# Altium PCB PCB_Placa-control-con-pi_2026-08-25.pcbdoc
Units mil, origin at the board's own origin, x right, y up, seen from the top; angles counter-clockwise.
Board outline 18712.17 x 9712.58 mil, 2 copper layers (Top Layer, Bottom Layer); 54 components, 56 nets, 179 pads, 7 vias.
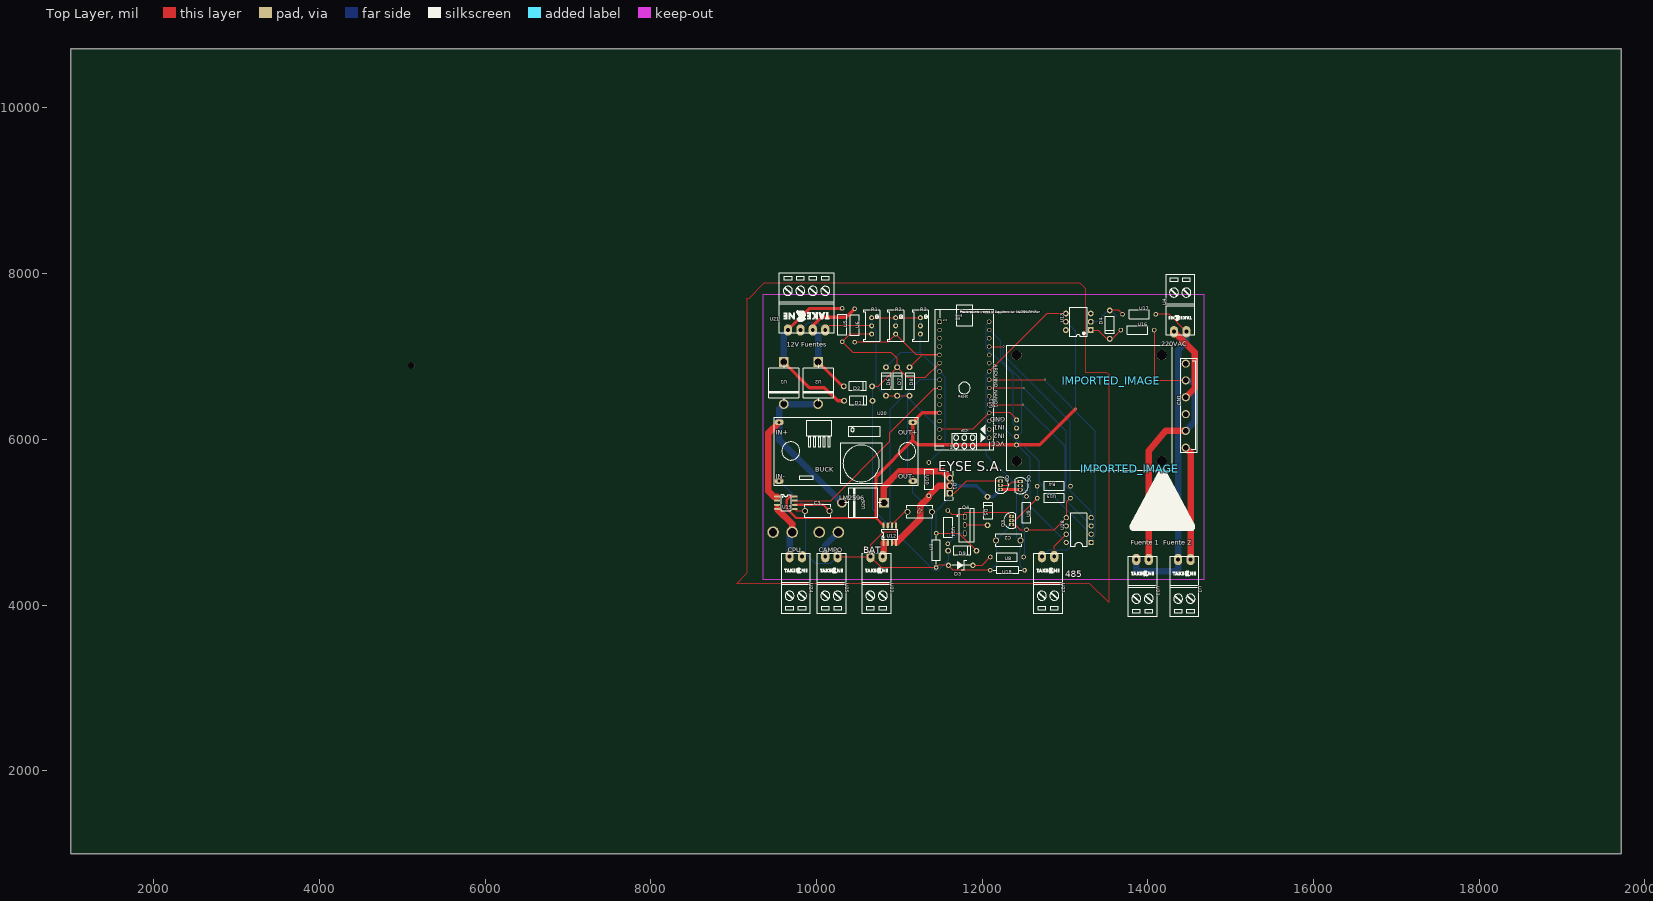
[diagram p0: Top Layer view]
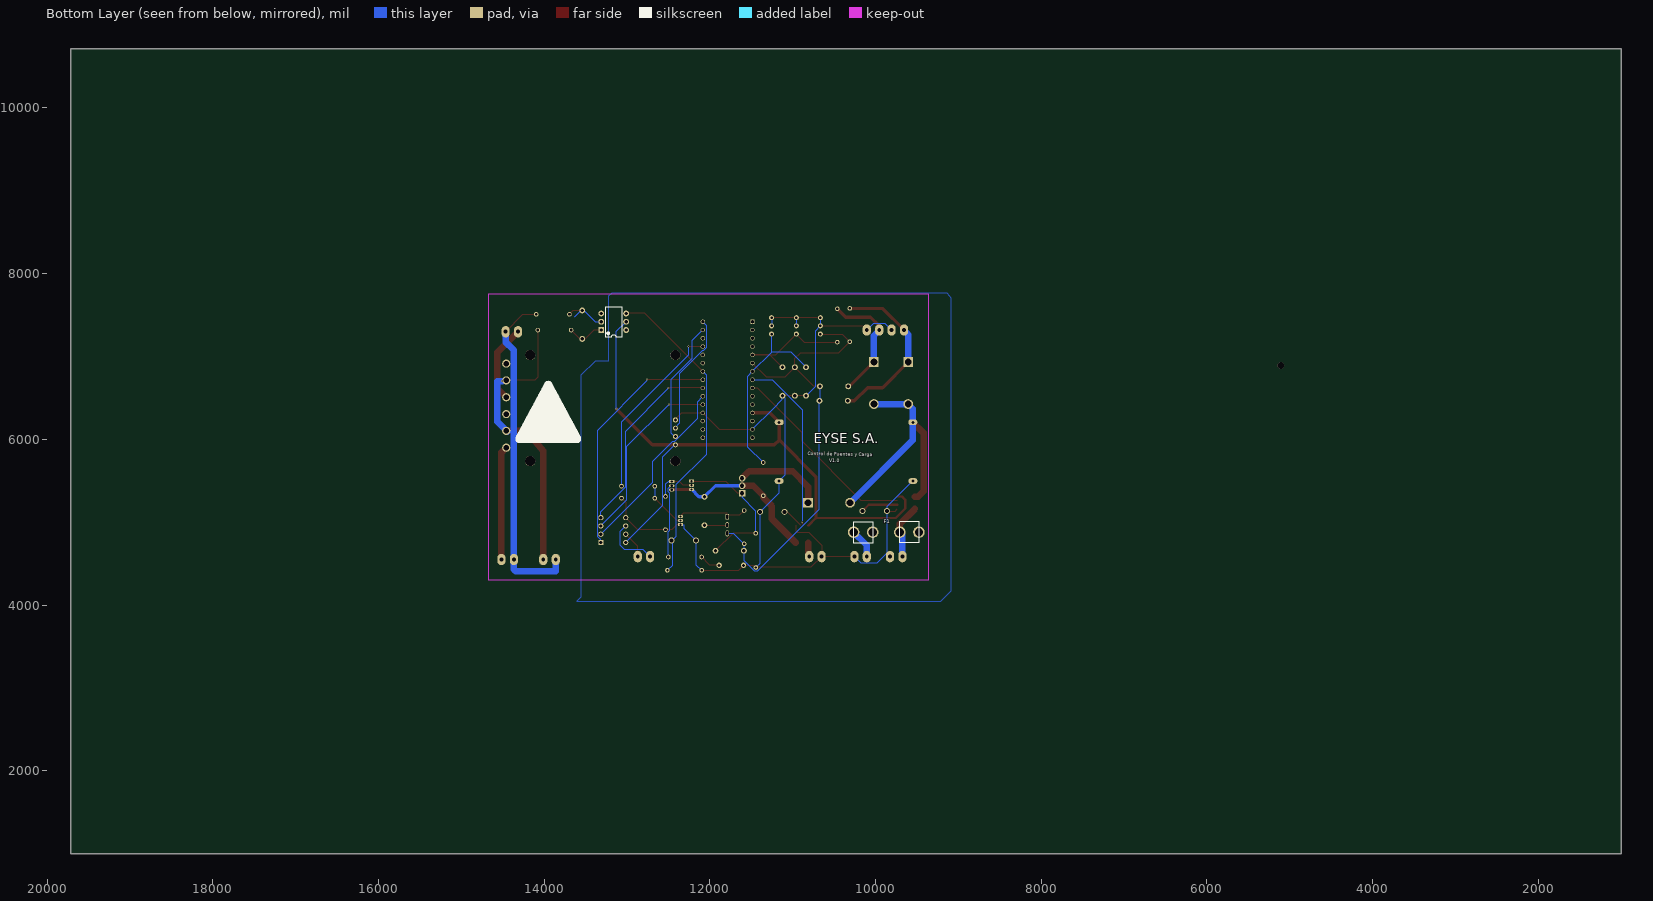
[diagram p1: Bottom Layer view, seen from below]

## Layer stack, top to bottom
Top Layer: signal copper (thickness not stored)
Dielectric: dielectric 12.6, FR-4, Dk 4.8
Bottom Layer: signal copper (thickness not stored)

## Board outline
19712.17,1000 1000,1000 1000,10712.58 19712.17,10712.58

## Components (designator, comment, footprint, x,y, rotation, side; value= is the part's Value field where it differs from the comment)
ARDUINO_NANO1 "ARDUINONANOV30_ARDUINO_NANO" ARDUINONANOV30_ARDUINO_NANO 11785.1,6619.56 r270 top
C1 "1nF" CAP-TH_L8.0-W4.0-P7.50-D1.2 11245.1,5124.56 r180 top
C2 "22nF" CAP-TH_L8.0-W4.0-P7.50-D1.2 12315.1,4779.56 r0 top
C3 "1nF" CAP-TH_L8.0-W4.0-P7.50-D1.2 10010.1,5134.56 r0 top
CN1 "Conn Reles" CONN66 14475.11,6198.95 r90 top
D1 "1N4007" DO-41_BD2.4-L4.7-P8.70-D0.9-RD 10505.1,6464.56 r180 top
D2 "1N4007" DO-41_BD2.4-L4.7-P8.70-D0.9-RD 10500.1,6639.56 r180 top
D3 "ZENNER-10 V" "ZENNER 7.5MM" 11750.1,4479.56 r0 top
D4 "1N4007" DO-41_BD2.4-L4.7-P8.70-D0.9-RD 13540.11,7383.95 r90 top
D5 "1N4007" DO-41_BD2.4-L4.7-P8.70-D0.9-RD 12065.1,5134.56 r270 top
D6 "1N4733A" DO-41_BD2.4-L4.7-P8.70-D0.9-RD 10838.49,6697.95 r270 top
D7 "1N4733A" DO-41_BD2.4-L4.7-P8.70-D0.9-RD 10973.49,6697.95 r270 top
D8 "1N4733A" DO-41_BD2.4-L4.7-P8.70-D0.9-RD 11123.49,6697.95 r270 top
D9 "1N4007" DO-41_BD2.4-L4.7-P8.70-D0.9-RD 11760.1,4654.56 r180 top
F1 "FUSEX20MM" FUSE_5MM 9870.1,4879.56 r90 bottom
IMPORTED_IMAGE "IMPORTED_IMAGE" IMPORTED_IMAGE 13556.43,6704.24 r0 top
IMPORTED_IMAGE "IMPORTED_IMAGE" IMPORTED_IMAGE 13781.37,5642.96 r0 top
Q1 "AP40P03GJ" TO-251_L6.6-W2.4-P2.30-L 11610.1,5439.56 r90 top
Q3 "2N3904" ? 12355.1,5019.56 r90 top
Q4 "IRF9530PBF" TO-220-3_L10.2-W4.5-P2.54-L 11790.1,4964.56 r270 top
Q5 "BC558B" TO-92-3_L4.9-W3.7-P1.27-L 12220.1,5444.56 r270 top
Q6 "BC558B" TO-92-3_L4.9-W3.7-P1.27-L 12460.1,5439.56 r270 top
R1 "Rvar- 50kΩ" RES-ADJ-TH_3P-L10.0-W10.0-P2.50-BL-BS 10665.1,7369.56 r0 top
R2 "Rvar- 50kΩ" RES-ADJ-TH_3P-L10.0-W10.0-P2.50-BL-BS 10955.1,7369.56 r0 top
R3 "Rvar- 50kΩ" RES-ADJ-TH_3P-L10.0-W10.0-P2.50-BL-BS 11255.1,7369.56 r0 top
R4 "3.3kΩ" RES-TH_BD2.7-L6.2-P10.20-D0.4 12865.1,5434.56 r180 top
U1 "20A10" R-6_BD8.9-L8.9-P12.90-D1.3-FD 9605.1,6679.56 r270 top
U2 "20A10" R-6_BD8.9-L8.9-P12.90-D1.3-FD 10020.1,6679.56 r270 top
U3 "18kΩ" RES-TH_BD2.3-L6.5-P10.50-D0.5 11445.1,4659.56 r90 top
U4 "Alim F1" "DETACHABLE SCREW TERMINAL 2 PIN 3.81 PITCH" 14390.11,7298.95 r90 top
U5 "150kΩ" RES-TH_BD2.7-L6.2-P10.20-D0.4 10310.1,7379.56 r90 top
U6 "150kΩ" RES-TH_BD2.7-L6.2-P10.20-D0.4 10460.1,7374.56 r90 top
U7 "Alim F2" "DETACHABLE SCREW TERMINAL 2 PIN 3.81 PITCH" 14440.11,4548.95 r270 top
U8 "56kΩ" RES-TH_BD2.7-L6.2-P10.20-D0.4 12300.1,4579.56 r0 top
U9 "18kΩ" RES-TH_BD2.7-L6.2-P10.20-D0.4 12535.1,5109.56 r90 top
U10 "150kΩ" RES-TH_BD2.7-L6.2-P10.20-D0.4 11355.1,5519.56 r270 top
U11 "Rele 2-modul" "RELE 2-X MODULE" 12315.11,5633.95 r90 top
U12 "ACS712ELCTR-05B-T-JSM" SOP-8_L4.9-W3.9-P1.27-LS6.0-BL 10885.1,4854.56 r0 top
U13 "4N35" 4N35 13160.11,7418.95 r90 top
U14 "10kΩ" RES-TH_BD2.7-L6.2-P10.20-D0.4 11585.1,4939.56 r270 top
U15 "10kΩ" RES-TH_BD2.7-L6.2-P10.20-D0.4 12865.1,5289.56 r180 top
U16 "56kΩ" RES-TH_BD2.7-L6.2-P10.20-D0.4 13875.11,7318.95 r0 top
U17 "56kΩ" RES-TH_BD2.7-L6.2-P10.20-D0.4 13895.11,7508.95 r0 top
U18 "18kΩ" RES-TH_BD2.3-L6.5-P10.50-D0.5 12305.1,4419.56 r0 top
U19 "ACS712ELCTR-05B-T-JSM" SOP-8_L4.9-W3.9-P1.27-LS6.0-BL 9630.1,5234.56 r270 top
U20 "LM2596 Fuente 5v" LM2596-BUCK-MODULE 9490.1,6264.56 r0 top
U21 "Entrada de Fuentes" "DETACHABLE SCREW TERMINAL 4 PIN 3.81 PITCH" 9880.1,7319.56 r90 top
U22 "Entrada Bateria" "DETACHABLE SCREW TERMINAL 2 PIN 3.81 PITCH" 10725.1,4584.56 r270 top
U23 "Entrada 220V" "DETACHABLE SCREW TERMINAL 2 PIN 3.81 PITCH" 13935.11,4548.95 r270 top
U24 "Alim Logotron" "DETACHABLE SCREW TERMINAL 2 PIN 3.81 PITCH" 9750.1,4584.56 r270 top
U25 "Alim Campo" "DETACHABLE SCREW TERMINAL 2 PIN 3.81 PITCH" 10180.1,4584.56 r270 top
U26 "20A10" R-6_BD8.9-L8.9-P12.90-D1.3-FD 10560.1,5234.56 r180 top
U27 "COM 485" "DETACHABLE SCREW TERMINAL 2 PIN 3.81 PITCH" 12795.1,4584.56 r270 top
U28 "MAX485EN" DIP-8_L10.0-W6.5-P2.54-LS7.6-BL 13165.1,4904.56 r90 top

## Footprints (in the part's own frame and the unit in brackets; to place one, negate y for a bottom-side part, rotate by r counter-clockwise, add the part's x,y. Pads: shape width x height; smd on the part's side, far side on the other; paste and mask are expansions set on the pad)
4N35 [mm]
  rect 1.8x1.8 hole 1 paste+0 mask+0.102: 1(-2.54,-3.81)
  round 1.8 hole 1 paste+0 mask+0.102: 2(0,-3.81) 3(2.54,-3.81) 4(2.54,3.81) 5(0,3.81) 6(-2.54,3.81)
  silkscreen extent -4.57,-2.65 4.45,2.65
ARDUINONANOV30_ARDUINO_NANO [mil]
  rect 51.5x51.5 hole 31.5 slot 31.7 at 0 deg paste+0 mask+2: 1(-800,-300)
  round 51.5 hole 31.5 slot 31.7 at 0 deg paste+0 mask+2: 2(-700,-300) 3(-600,-300) 4(-500,-300) 5(-400,-300) 6(-300,-300) 7(-200,-300) 8(-100,-300) 9(0,-300) 10(100,-300) 11(200,-300) 12(300,-300) 13(400,-300) 14(500,-300) 15(600,-300) 16(600,300) 17(500,300) 18(400,300) 19(300,300) 20(200,300) 21(100,300) 22(0,300) 23(-100,300) 24(-200,300) 25(-300,300) 26(-400,300) 27(-500,300) 28(-600,300) 29(-700,300) 30(-800,300)
  silkscreen extent -1000,-350 750,350
CAP-TH_L8.0-W4.0-P7.50-D1.2 [mm]
  round 1.8 hole 1.2 paste+0 mask+0.051: 1(-3.75,0) 2(3.75,0)
  silkscreen extent -4,-2 4,2
CONN66 [mm]
  round 2.5 hole 1.7 paste+0 mask+0.051: 1(18.161,0.445) 2(13.005,0.445) 3(7.849,0.445) 4(2.692,0.445) 5(-2.464,0.445) 6(-7.62,0.445)
  silkscreen extent -9.14,-2.92 19.81,2.03
"DETACHABLE SCREW TERMINAL 2 PIN 3.81 PITCH" [mm]
  oval 3.5x2.5 hole 1.2 paste+0 mask+0.051: 1(0,1.905) 2(0,-1.905)
  silkscreen extent -1.02,-4.32 17.6,4.32
"DETACHABLE SCREW TERMINAL 4 PIN 3.81 PITCH" [mm]
  oval 3.5x2.5 hole 1.2 paste+0 mask+0.051: 1(0,5.715) 2(0,1.905) 3(0,-1.905) 4(0,-5.715)
  silkscreen extent -1,-8.35 17.6,8.3
DIP-8_L10.0-W6.5-P2.54-LS7.6-BL [mil]
  rect 63x63 hole 39.37 paste+0 mask+2: 1(-150,-150)
  round 63 hole 39.37 paste+0 mask+2: 2(-50,-150) 3(50,-150) 4(150,-150) 5(150,150) 6(50,150) 7(-50,150) 8(-150,150)
  silkscreen extent -200,-100 200,100
DO-41_BD2.4-L4.7-P8.70-D0.9-RD [mm]
  round 1.8 hole 1 paste+0 mask+0.051: 1(-4.35,0) 2(4.35,0)
  silkscreen extent -2.6,-1.4 2.6,1.4
FUSE_5MM [mil]
  round 140 hole 100 paste+0 mask+2: 1(0,394) 2(0,164) 3(0,-164) 4(0,-394)
  silkscreen extent -127,-399 127,399
IMPORTED_IMAGE [mil]
LM2596-BUCK-MODULE [mm]
  oval 2.8x1.8 hole 0.9 paste+0 mask+0.102: 1(1.5,-1.5)
  oval 2.8x1.8 hole 0.914 paste+0 mask+0.102: 2(1.5,-19.5) 3(42.5,-1.5) 4(42.5,-19.5)
  silkscreen extent 0,-21 44,0
R-6_BD8.9-L8.9-P12.90-D1.3-FD [mm]
  rect 3x3 hole 2.1 paste+0 mask+0.051: 1(-6.45,0)
  round 3 hole 2.1 paste+0 mask+0.051: 2(6.45,0)
  silkscreen extent -5.6,-4.55 5.6,4.55
"RELE 2-X MODULE" [mm]
  round 1.524 hole 0.914 paste+0 mask+0.102: 1(15.24,-2.54) 2(12.7,-2.54) 3(10.16,-2.54) 4(7.62,-2.54)
  round 3.1 hole 3.1 unplated paste+0: ""(2.6,-2.54) ""(2.6,-47.04) ""(35.1,-47.04) ""(35.1,-2.54)
  silkscreen extent -0.4,-50.04 38.1,0.46
RES-ADJ-TH_3P-L10.0-W10.0-P2.50-BL-BS [mil]
  round 60 hole 30 paste+0 mask+2: 1(0,98.43) 2(0,0) 3(0,-98.43)
  silkscreen extent -98,-187 96,187
RES-TH_BD2.3-L6.5-P10.50-D0.5 [mm]
  round 1.4 hole 0.7 paste+0 mask+0.051: 1(-5.25,0) 2(5.25,0)
  silkscreen extent -4.32,-1.15 4.32,1.15
RES-TH_BD2.7-L6.2-P10.20-D0.4 [mm]
  round 1.4 hole 0.8 paste+0 mask+0.051: 1(-5.1,0) 2(5.1,0)
  silkscreen extent -3.1,-1.35 3.1,1.35
SOP-8_L4.9-W3.9-P1.27-LS6.0-BL [mm]
  oval 0.63x1.865 smd paste+0 mask+0.051: 1(-1.905,-2.682) 2(-0.635,-2.682) 3(0.635,-2.682) 4(1.905,-2.682) 5(1.905,2.682) 6(0.635,2.682) 7(-0.635,2.682) 8(-1.905,2.682)
  silkscreen extent -2.5,-1.5 2.5,1.48
TO-92-3_L4.9-W3.7-P1.27-L [mm]
  rect 0.9x1.6 hole 0.7 paste+0 mask+0.051: 1(-1.27,0)
  oval 0.9x1.6 hole 0.7 paste+0 mask+0.051: 2(0,0) 3(1.27,0)
  silkscreen extent -2.48,-1.5 2.48,2.48
TO-220-3_L10.2-W4.5-P2.54-L [mm]
  rect 1.8x1 hole 0.6 slot 1.2 at 0 deg paste+0 mask+0.051: 1(-2.54,0)
  oval 1.8x1 hole 0.6 slot 1.2 at 0 deg paste+0 mask+0.051: 2(0,0) 3(2.54,0)
  silkscreen extent -5.23,-2.42 5.23,2.8
TO-251_L6.6-W2.4-P2.30-L [mm]
  rect 2x2 hole 1.3 paste+0 mask+0.051: 1(-2.3,0)
  round 2 hole 1.3 paste+0 mask+0.051: 2(0,0) 3(2.3,0)
  silkscreen extent -4.44,-1.06 4.44,1.69
"ZENNER 7.5MM" [mm]
  round 1.642 hole 0.913 paste+0 mask+0.102: 1(-4,0) 2(3.5,0)
  silkscreen extent -2.93,-1.5 2.5,1.5
? [mm]
  rect 0.9x1.6 hole 0.7 paste+0 mask+0.051: 1(-1.27,0)
  oval 0.9x1.6 hole 0.7 paste+0 mask+0.051: 2(0,0) 3(1.27,0)
  silkscreen extent -2.41,-1.35 2.41,2.41

## Free pads (board coordinates)
  round 80 hole 80 unplated paste+0: ""(5105.93,6891.38)

## Via types
v1: diameter 24, hole 12, Top Layer to Bottom Layer, tented both sides, 6 vias
v2: diameter 24.41, hole 12.2, Top Layer to Bottom Layer, tented both sides, 1 vias

## Nets (pads, with @x,y where several pads share a name; then routed paths per layer and width w, separated by ;. In a path a pad name is that pad's centre, name@x,y a point inside that pad or via, vN(x,y) a via of type N, cw(c..) or ccw(c..) an arc to the next point about the centre after c; other vN are vias at no path point)
ARDUINO_NANO1_1: ARDUINO_NANO1.1
ARDUINO_NANO1_2: ARDUINO_NANO1.2
ARDUINO_NANO1_3: ARDUINO_NANO1.3
ARDUINO_NANO1_4: ARDUINO_NANO1.4
ARDUINO_NANO1_10: ARDUINO_NANO1.10
ARDUINO_NANO1_11: ARDUINO_NANO1.11
ARDUINO_NANO1_13: ARDUINO_NANO1.13
ARDUINO_NANO1_15: ARDUINO_NANO1.15
ARDUINO_NANO1_16: ARDUINO_NANO1.16
ARDUINO_NANO1_17: ARDUINO_NANO1.17
ARDUINO_NANO1_18: ARDUINO_NANO1.18
ARDUINO_NANO1_20: ARDUINO_NANO1.20 U28.3 | length 2214.2
  Top Layer w10: ARDUINO_NANO1.20 v1(12494.29,6419.56)
  Bottom Layer w10: v1(12494.29,6419.56) 12999.99,5913.86 12999.99,5269.67 U28.3
ARDUINO_NANO1_21: ARDUINO_NANO1.21 U28.2 | length 2187.5
  Bottom Layer w10: ARDUINO_NANO1.21 12148.29,6456.37 12148.29,6252.69 12423.59,5977.39 12445.89,5977.39 12686.89,5736.39 12686.89,5482.77 U28.2
ARDUINO_NANO1_22: ARDUINO_NANO1.22 U28.4 | length 2315.1
  Top Layer w10: ARDUINO_NANO1.22 v1(12495.85,6619.56)
  Bottom Layer w10: v1(12495.85,6619.56) 13016.05,6099.36 13016.05,5427.05 13315.1,5128 U28.4
ARDUINO_NANO1_23: ARDUINO_NANO1.23 U28.1 | length 2911
  Top Layer w10: ARDUINO_NANO1.23 v1(12758.79,6719.56)
  Bottom Layer w10: v1(12758.79,6719.56) 12758.79,6704.14 13358.18,6104.75 13358.18,4829.52 13325.73,4797.07 13315.1,4797.07 U28.1
ARDUINO_NANO1_25: ARDUINO_NANO1.25
ARDUINO_NANO1_26: ARDUINO_NANO1.26
ARDUINO_NANO1_28: ARDUINO_NANO1.28
C1_2: C1.2 U12.6 | length 261.3
  Top Layer w10: U12.6 10910.11,4970.09 11064.58,5124.56 C1.2
CN1_3: CN1.3 U4.1 | length 939.1
  Top Layer w78.74: U4.1 14565.11,7048.95 14565.11,6615.45 CN1.3
CN1_6: CN1.6 U7.1 | length 1373.8
  Top Layer w78.74: CN1.6 14515.11,5841.45 U7.1
D5_1: D5.1 Q1.2 Q5.3 Q6.3 U10.2 U12.3 U12.4 | length 1982.7
  Top Layer w39.37: Q5.3 12455.1,5394.56 Q6.3
  Top Layer w78.74: U12.4 11250.11,5038.95 11250.11,5193.95 11355.1,5298.94 U10.2 11475.89,5439.56 Q1.2
  Bottom Layer w39.37: Q1.2 11931.36,5439.56 D5.1 12131.36,5305.82 Q5.3
D5_2: D5.2 Q4.2 | length 275.5
  Top Layer w10: Q4.2@11790.1,4964.55 11791.35,4963.3 D5.2
F1_1: F1.1 U25.2 | length 345.9
  Bottom Layer w78.74: U25.2@10105.1,4599.56 10105.1,4720.56 F1.1
GND: ARDUINO_NANO1.14 ARDUINO_NANO1.19 C1.1 C2.1 C3.1 D3.1 D6.2 D7.2 D8.2 Q3.1 R1.1 R1.2 R2.1 R2.2 R3.1 R3.2 U3.1 U9.1 U11.1 U12.5 U15.1 U18.1 U19.5 U20.2 U20.4 U21.2 U21.4 U22.2 U24.1 U25.1 U28.5 | length 12752.9
  Top Layer w10: U19.5@9735.71,5159.55 9760.7,5134.56 C3.1 ; U21.4 10155.09,7369.55 R1.2@10665.11,7369.55 ; U25.1 U22.2 ; R1.1 R2.1 R3.1 ; D6.2 D7.2 D8.2 ; U12.5 10960.1,4893.96 10945.1,4878.96 10805.1,4878.96 10650.1,4723.96 U22.2 ; ARDUINO_NANO1.14 11885.1,6119.56 ARDUINO_NANO1.19 12339.5,6319.56 U11.1@12425.11,6233.95 ; U18.1 11652.62,4419.56 D3.1 11471.79,4479.56 U3.1 10781.79,4452.87 U22.2 ; Q3.1 12397.61,4969.56 12458.4,4908.77 U9.1 12869.31,4908.77 U28.5 13015.1,5238.77 U15.1
  Bottom Layer w10: U20.2 9862.46,5183.54 C3.1 U24.1@9862.46,4621.92 ; U21.2 9887.95,7402.41 10022.25,7402.41 U21.4 ; U24.1 U24.1@9862.46,4621.92 ; U25.1 10172.15,4501.61 9982.77,4501.61 U24.1@9862.46,4621.92 ; R1.1 10665.11,7369.55 10722.47,7312.19 10722.47,6642.71 D6.2 ; R2.2@10955.11,7369.55 R2.1 ; D8.2 11096.6,6499.76 11096.6,5563.56 U20.4@11163.3,5496.86 ; D8.2 11123.49,6481.17 11236.5,6368.17 ARDUINO_NANO1.14 ; U20.4 11163.33,5353.97 C1.1 11392.74,4505.23 U3.1 ; R3.2@11255.11,7369.55 R3.1 ; U18.1 12167.46,4488.61 C2.1 12312.59,4924.69 12312.59,4969.56 Q3.1
Q5_2: Q5.2 Q6.1 U9.2 | length 493.8
  Top Layer w10: Q5.2 12320.72,5444.56 12365.72,5489.56 Q6.1
  Bottom Layer w10: Q6.1 12502.61,5489.56 12535.1,5457.07 U9.2
Q6_2: Q6.2 U8.2 | length 902
  Bottom Layer w10: Q6.2 12468.47,5439.56 12506.5,5401.53 12506.5,5370.8 12491.74,5356.04 12491.74,4895.73 12510.49,4876.98 12510.49,4589.16 U8.2
R2_3: ARDUINO_NANO1.5 D8.1 R2.3 U6.1 | length 1593.4
  Top Layer w10: U6.1 10857.75,7173.77 R2.3 11206.68,7019.56 ARDUINO_NANO1.5 11273.84,7019.56 D8.1
R4_1: ARDUINO_NANO1.27 R4.1 | length 2190.6
  Top Layer w10: ARDUINO_NANO1.27 v1(12254.61,7119.56)
  Bottom Layer w10: v1(12254.61,7119.56) 12254.61,7023.73 13065.89,6212.45 R4.1
R4_2: Q3.2 R4.2 U15.2 | length 566
  Top Layer w10: Q3.2 12394.31,5019.56 U15.2
  Bottom Layer w10: U15.2 R4.2
S$1232: 
S$14515: 
U1_1: D1.2 U1.1 U5.2 U21.1 | length 2087.8
  Top Layer w39.37: U1.1 9914.65,6623.95 10095.11,6623.95 10254.5,6464.56 D1.2 ; U21.1 9915.89,7580.35 U5.2
  Bottom Layer w78.74: U1.1 9605.1,7264.56 U21.1@9655.1,7314.56
U1_2: U1.2 U2.2 U19.1 U19.2 U20.1 U26.2 | length 2958.5
  Top Layer w78.74: U19.1@9524.49,5309.55 9485.11,5309.55 9420.1,5374.56 9420.1,6076.44 U20.1
  Bottom Layer w78.74: U2.2 U1.2 9549.16,6369.68 U20.1 9549.16,5991.56 U26.2
U2_1: D2.2 U2.1 U6.2 U21.3 | length 1478.4
  Top Layer w39.37: U21.3 9955.1,7368.94 10060.11,7473.95 10358.7,7473.95 U6.2 ; U2.1 10314.04,6639.56 D2.2
  Bottom Layer w78.74: U21.3@9955.1,7314.56 10020.1,7249.56 U2.1
U3_2: D9.1 Q1.1 Q5.1 U3.2 | length 1795.3
  Top Layer w10: U3.2@11445.1,4866.25 11719.67,4866.25 D9.1 ; Q1.1 11660.48,5349.01 11806.03,5494.56 Q5.1
  Bottom Layer w10: U3.2@11445.1,4866.25 11445.1,5133.63 11610.1,5298.63 Q1.1
U8_1: D3.2 U8.1 | length 252.8
  Top Layer w10: D3.2 11999.31,4479.56 U8.1
U10_1: ARDUINO_NANO1.7 D6.1 R3.3 U10.1 | length 2242.2
  Bottom Layer w10: D6.1 11018.83,7049.55 11255.11,7049.55 ; R3.3 11255.11,7049.55 ; U10.1 11546.59,5911.84 11546.59,6758.07 ARDUINO_NANO1.7 11255.11,7049.55
U11_2: ARDUINO_NANO1.30 U11.2 | length 1467.6
  Bottom Layer w10: ARDUINO_NANO1.30 12043.27,7377.73 12043.27,7104.13 12077.84,7069.56 12088.86,7069.56 12366.17,6792.25 12366.17,6192.89 U11.2@12425.11,6133.95
U11_3: ARDUINO_NANO1.29 U11.3 | length 1464.5
  Bottom Layer w10: ARDUINO_NANO1.29 12216.2,7188.46 12216.2,6974.74 12471.05,6719.89 12471.05,6079.89 U11.3@12425.11,6033.95
U12_1: U12.1 U12.2 U22.1 | length 168.5
  Top Layer w78.74: U22.1 10810.11,4594.57 U12.1
U12_7: ARDUINO_NANO1.8 U12.7 | length 2156.6
  Top Layer w10: U12.7 10884.16,4984.22 v1(10884.16,5004.74)
  Bottom Layer w10: v1(10884.16,5004.74) 10884.16,6354.81 11248.91,6719.56 ARDUINO_NANO1.8
U12_8: ARDUINO_NANO1.12 U11.4 U12.8 U13.5 U19.8 U20.3 U28.8 | length 7874.2
  Top Layer w27.56: U19.8@9735.71,5309.55 9680.71,5309.55 9640.11,5268.95 9640.11,5163.95 9755.11,5048.95 10721.33,5048.95 U12.8
  Top Layer w39.37: 10719,5048.95 10719,5548.57 11163.33,5992.91 ; ARDUINO_NANO1.12 11277.39,6319.56 U20.3 11163.33,5990.77 11220.15,5933.95 12425.11,5933.95 12693.21,5933.95 v1(13127.39,6368.13)
  Bottom Layer w10: U11.4@12425.11,5933.95 12573.72,5785.34 12573.72,5195.94 U28.8 ; U13.5 13127.39,7301.67 v1(13127.39,6368.13)
U13_1: D4.1 U13.1 U16.1 | length 472.5
  Top Layer w10: U13.1 13397.15,7318.95 13401.54,7314.56 13503.41,7212.69 D4.1 13568.06,7212.69 U16.1
  Bottom Layer w10: D4.1@13520.1,7213.3 13539.5,7213.3 D4.1
U13_2: D4.2 U13.2 U17.1 | length 584.5
  Top Layer w10: D4.2 13648.06,7555.21 U17.1
  Bottom Layer w10: U13.2 13383.23,7418.95 13520.1,7555.82 13554.15,7555.82 13632.18,7477.79
U13_4: ARDUINO_NANO1.24 C2.2 U13.4 U18.2 | length 3831.9
  Top Layer w10: ARDUINO_NANO1.24 12784.49,7518.95 U13.4
  Bottom Layer w10: ARDUINO_NANO1.24 12044.81,6779.27 12044.81,5814.18 12409,5449.99 12409,4826.26 C2.2@12455.7,4779.56 ; C2.2 C2.2@12455.7,4779.56 ; U18.2 12455.7,4475.65 C2.2@12455.7,4779.56
U14_1: Q3.3 Q4.1 U14.1 | length 855.4
  Top Layer w10: U14.1 11637.66,5087.79 Q4.1@11790.1,5087.79 ; Q4.1 Q4.1@11790.1,5087.79 ; Q3.3 12313.65,5111.01 11790.1,5111.01 Q4.1@11790.1,5087.79
U14_2: ARDUINO_NANO1.6 D1.1 D2.1 D7.1 D9.2 Q4.3 R1.3 U5.1 U14.2 | length 5491.4
  Top Layer w10: R1.3 10402.46,7271.13 U5.1 10444.92,7043.95 10905.11,7043.95 10973.49,6975.57 D7.1 ; D2.1 10743.84,6639.56 D7.1 ; ARDUINO_NANO1.6 11314.49,6748.95 11093.75,6748.95 D7.1
  Bottom Layer w10: D2.1 10671.36,6469.56 D1.1 10676.36,5156.89 11420.24,4413.01 11463.69,4413.01 11588.84,4538.16 D9.2 U14.2@11588.84,4738.77 ; U14.2 U14.2@11588.84,4738.77 ; Q4.3@11790.1,4864.55 11714.62,4864.55 U14.2@11588.84,4738.77
U16_2: CN1.2 CN1.5 U16.2 U23.1 | length 3621.7
  Top Layer w10: U16.2@14075.9,7318.96 14075.1,6748.96 14113.1,6710.96 CN1.2@14457.6,6710.96
  Top Layer w78.74: U23.1 14010.11,5858.95 14213.11,6101.95 CN1.5
  Bottom Layer w10: CN1.2@14442.6,6701.56 v2(14505.55,6701.56)
  Bottom Layer w78.74: CN1.5@14442.6,6092.56 14565.1,6215.06 14565.1,6701.56 v2(14505.55,6701.56)
U17_2: U4.2 U7.2 U17.2 U23.2 | length 4020.9
  Top Layer w10: U17.2 14255.11,7508.95 U4.2
  Bottom Layer w78.74: U23.2@13860.1,4548.96 13860.1,4408.96 14345.1,4408.96 14365.1,4428.96 14365.1,4548.96 14365.1,7073.96 14465.1,7173.96 U4.2@14465.1,7298.96
U19_3: F1.3 U19.3 U19.4 U24.2 | length 638.1
  Top Layer w78.74: U19.4@9524.49,5159.55 9706.1,4977.94 F1.3
  Bottom Layer w78.74: U24.2@9675.1,4609.56 9675.1,4848.56 F1.3
U19_6: C3.2 U19.6 | length 453.1
  Top Layer w27.56: U19.6@9735.71,5209.55 10082.75,5209.55 C3.2
U19_7: ARDUINO_NANO1.9 U19.7 | length 2374.2
  Top Layer w10: U19.7@9735.71,5259.55 10170.71,5259.55 10885.11,5973.95 10885.11,6078.95 11420.11,6613.95 11479.49,6613.95 ARDUINO_NANO1.9
U26_1: Q1.3 U26.1 | length 1101.2
  Top Layer w78.74: U26.1 10814.04,5427.88 11000.11,5613.95 11526.26,5613.95 Q1.3
U27_1: U27.1 U28.7 | length 330.1
  Top Layer w10: U27.1 12870.1,4709.56 U28.7
U27_2: U27.2 U28.6 | length 678.2
  Bottom Layer w10: U27.2 12801.3,4665.76 13026.9,4665.76 13080.1,4718.96 13080.1,4889.56 U28.6
pads on no net: CN1.1 CN1.4 F1.2 F1.4 U11. U13.3 U13.6

## Polygon pours and split planes (outlines as drawn)
GND on Bottom Layer (solid): 9135.11,7763.95 13185.11,7763.95 13225.11,7723.95 13225.11,6943.95 13385.11,6943.95 13555.11,6773.95 13555.11,4093.95 13605.11,4043.95 9215.11,4043.95 9085.11,4173.95 9085.11,7703.95 9105.11,7723.95
GND on Top Layer (solid): 13525.11,4033.95 13300.11,4258.95 9035.11,4258.95 9165.11,4388.95 9165.11,7688.95 9152.3,7701.75 9180.11,7698.95 9370.11,7888.95 13180.11,7888.95 13245.11,7823.95 13245.11,6808.95 13500.11,6808.95 13525.11,6783.95 13525.11,4033.95

## Silkscreen, mask and mechanical layers (free items; w line width, h text height)
Top Overlay:
  text "220VAC" at 14160.1,7125.03 h59.05
  text "12V Fuentes" at 9640.11,7114.42 h59.05
  text "EYSE S.A." at 11470.13,5616.67 h118.11
  text "Fuente 1" at 13790.34,4725.02 h59.05
  text "Fuente 2" at 14184.04,4725 h59.05
  text "CPU" at 9655.12,4639.79 h59.05
  text "CAMPO" at 10030.13,4636.2 h59.05
  text "BAT" at 10565.11,4623.95 h80
  text "485" at 13000.11,4333.95 h80
Bottom Overlay:
  text "EYSE S.A." at 10745.11,5949.89 h118.11
  text "Control de Fuentes y Carga" at 10815.46,5807.66 h39.37 r1
  text "V1.0" at 10560.13,5721.04 h39.37

## Text inside footprints (layer, text, board x,y; h text height)
ARDUINO_NANO1: Top Overlay "Reset" at 11713.1,6503.56 h32; Top Overlay "1" at 11575.1,7419.56 h40 r90; Top Overlay "Mini-B / USB" at 11677.1,7445.56 h24; Top Overlay "ICSP" at 11835.1,6119.56 h32 r180; Top Overlay "1" at 11610.1,5879.56 h40; Top Overlay "This library was created by Esp. Marco-Luis SALCEDO TOVAR. / Please report any errors or suggestions to: YV1HX@CANTV.NET / Thanks you!!!" at 11735.1,7519.56 h2
U11: Top Overlay "GND" at 12280.11,6268.48 h59.05 r180; Top Overlay "IN1" at 12275.11,6168.48 h59.05 r180; Top Overlay "IN2" at 12275.11,6068.48 h59.05 r180; Top Overlay "VCC" at 12275.11,5968.48 h59.05 r180
U20: Top Overlay "IN+" at 9509.79,6057.86 h59.05; Top Overlay "IN-" at 9509.79,5526.37 h59.05; Top Overlay "OUT+" at 10986.16,6057.86 h59.05; Top Overlay "OUT-" at 10986.16,5526.37 h59.05; Top Overlay "LM2596" at 10275.1,5265.03 h59.05; Top Overlay "BUCK" at 9985.1,5610.03 h59.05